# Allegro board pcb-01_place_manually.brd
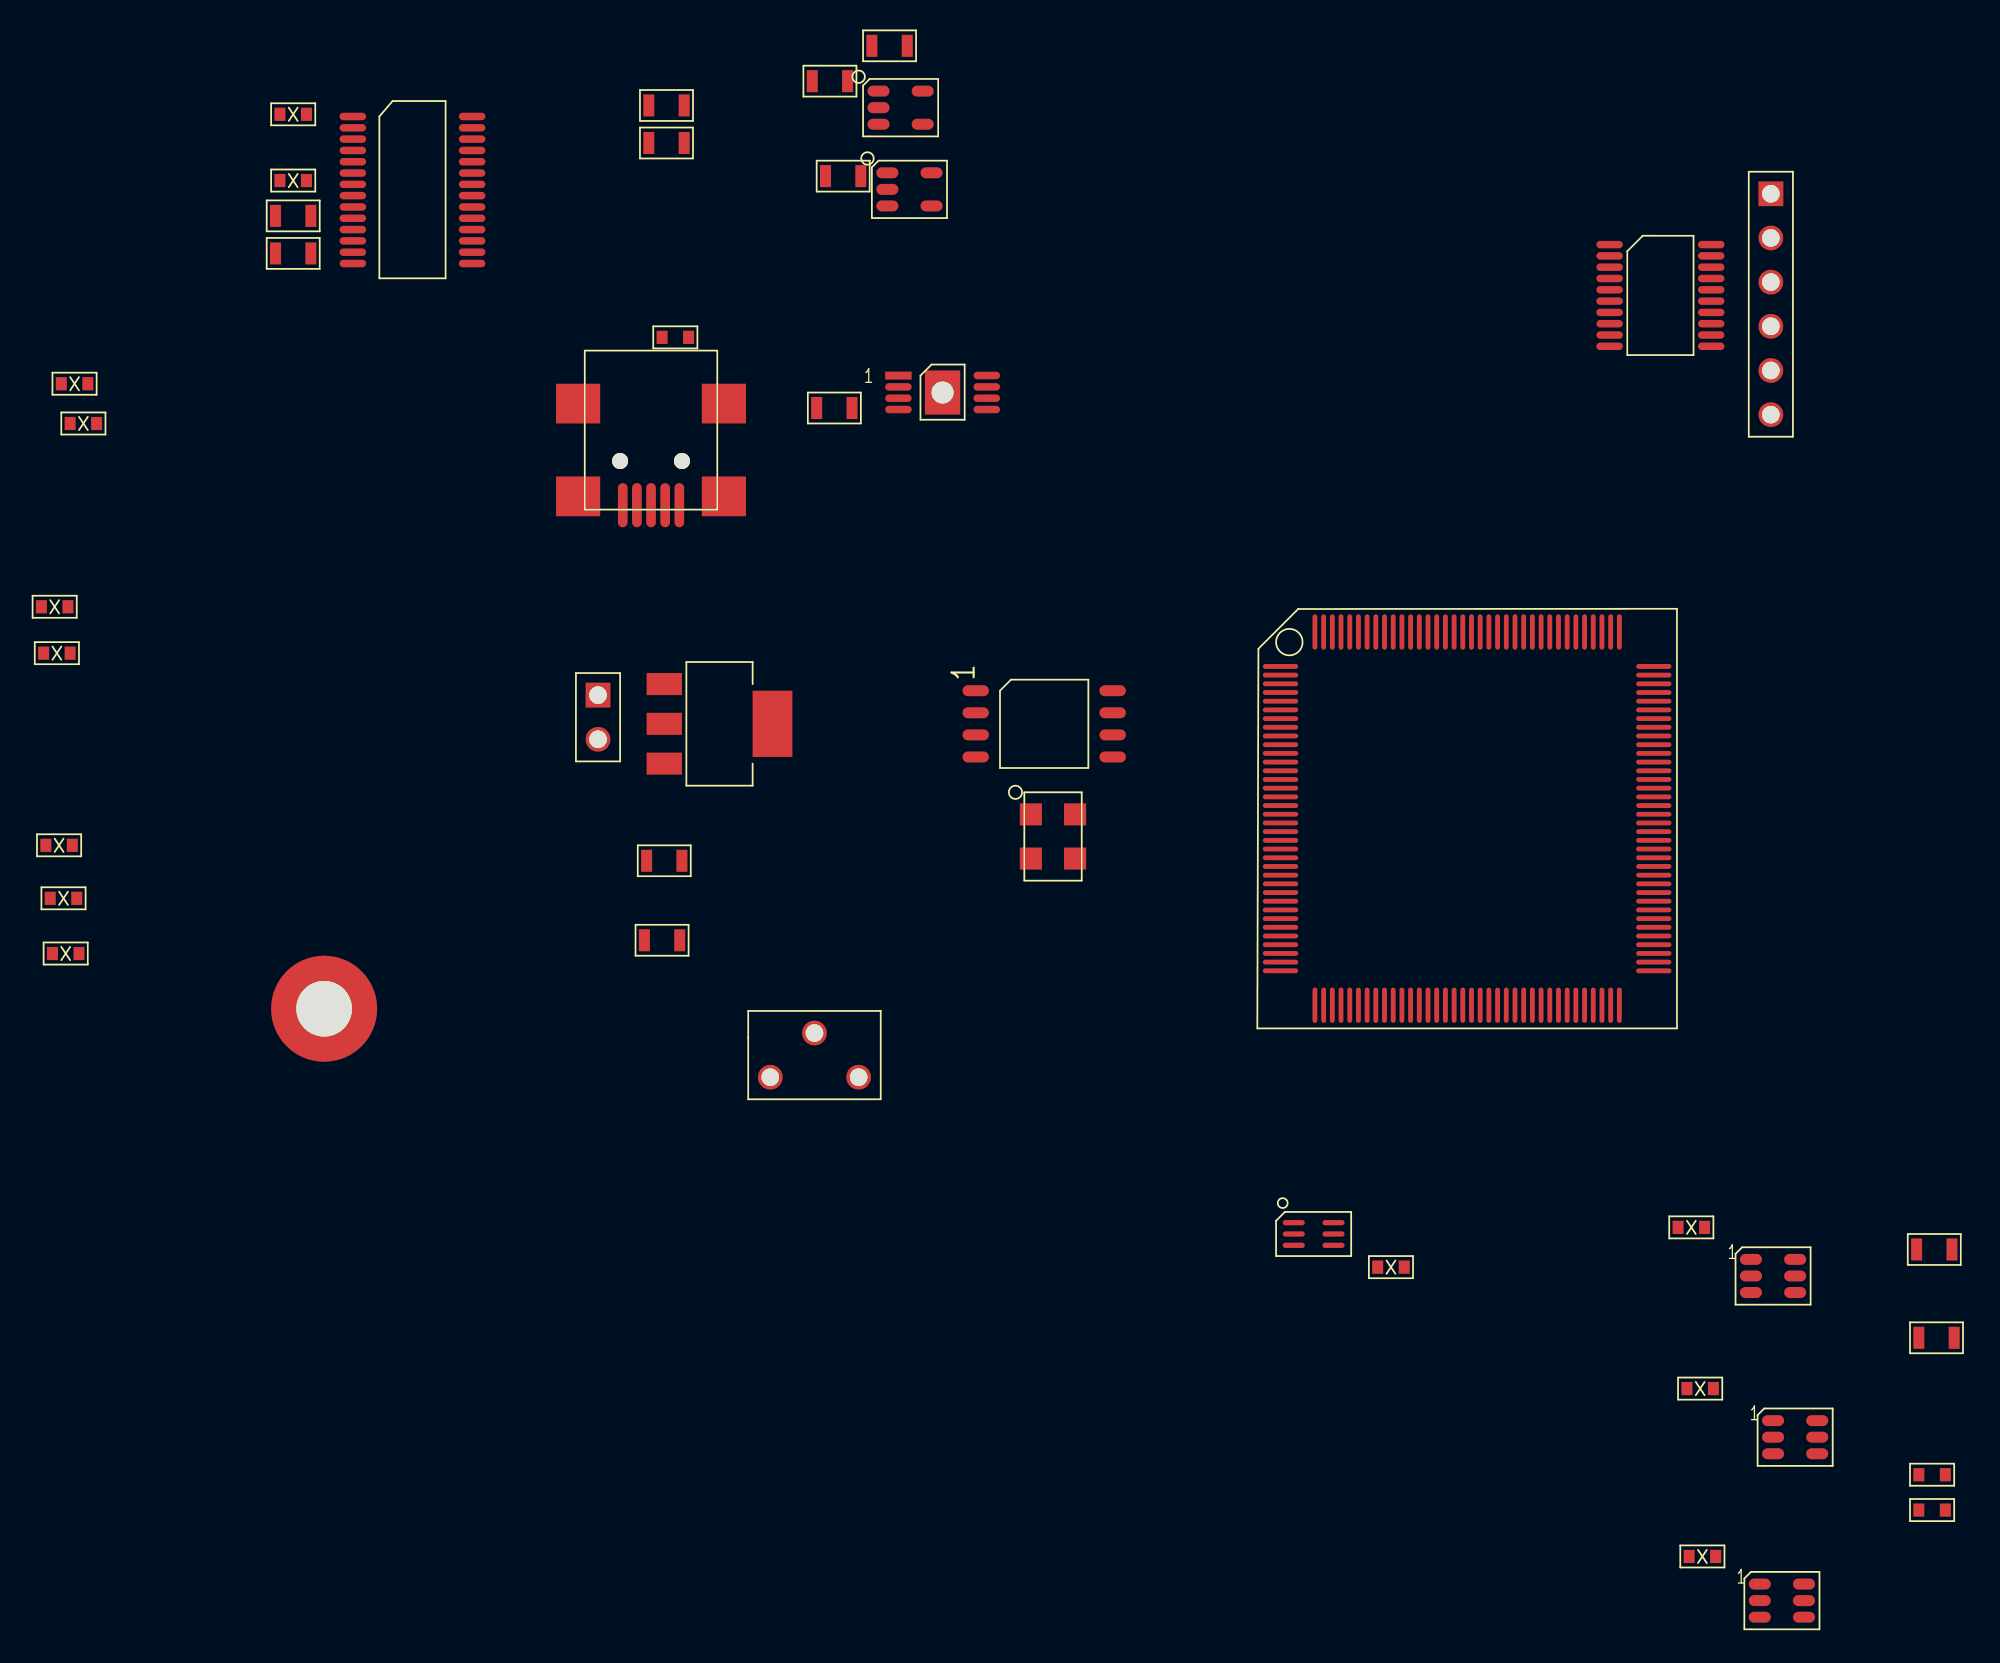
[diagram p0: board, top side]
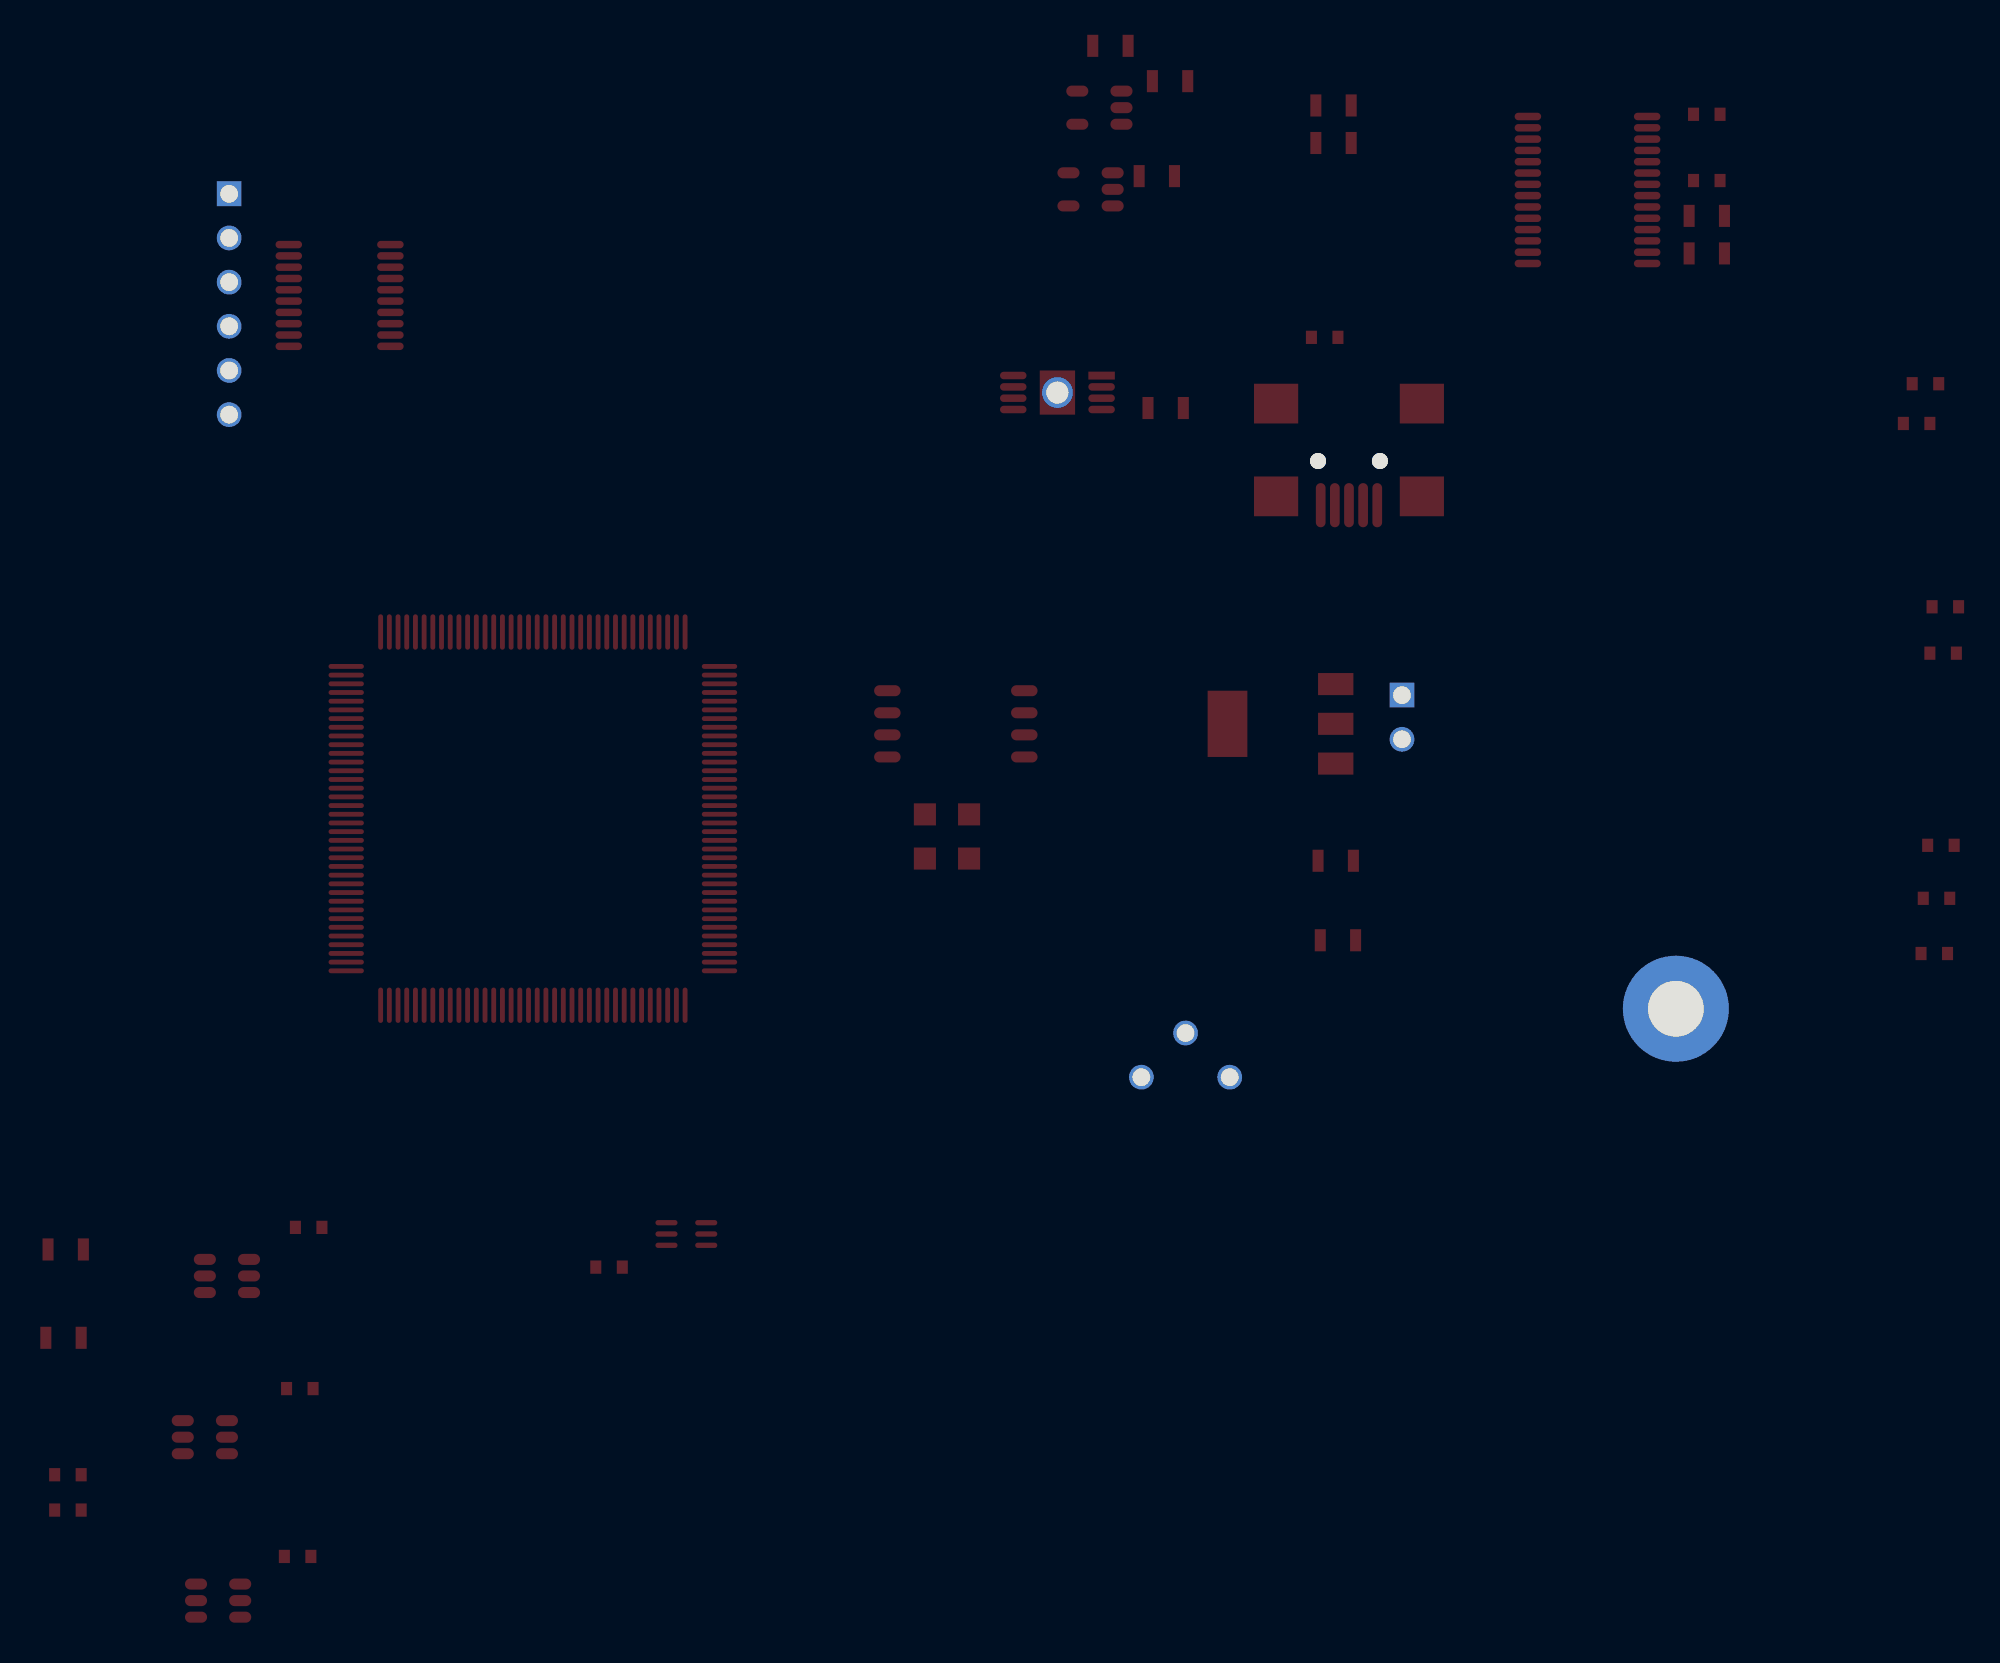
[diagram p1: board, bottom side, seen from below]

No outline. copper layers: TOP, IN1, IN2, BOTTOM. Coordinates in mm from the lowest, leftmost part position.

## Design rules (mm)
constraint set DEFAULT: min track width 0.203

## Placement (name value [footprint] x y rotation side)
C2  1uF  [S_0805]  44.58 87.38 0 top
C4  47uF/6.3V  [S_0805]  35.18 85.98 0 top
C5  47uF/6.3V  [S_0805]  48.01 89.41 0 top
C6  47uF/6.3V  [S_0805]  45.34 81.91 0 top
C7  100nF  [S_0603_X]  13.72 85.47 0 top
C11  47uF/6.3V  [S_0805]  35.18 83.82 0 top
C12  47uF/6.3V  [S_0805]  44.83 68.58 0 top
C14  100nF  [S_0603_X]  13.72 81.66 0 top
C16  100nF  [S_0603_X]  1.14 69.98 0 top
C18  100nF  [S_0603_X]  1.65 67.69 0 top
C24  100nF  [S_0603_X]  0 57.15 0 top
C26  100nF  [S_0603_X]  0.13 54.48 0 top
C32  100nF  [S_0603_X]  0.25 43.43 0 top
C34  100nF  [S_0603_X]  0.51 40.39 0 top
C36  100nF  [S_0603_X]  0.64 37.21 0 top
C46  100nF  [S_0603_X]  76.84 19.18 0 top
C47  100nF  [S_0603_X]  94.11 21.46 0 top
C49  100nF  [S_0603_X]  94.62 12.19 0 top
C51  100nF  [S_0603_X]  94.74 2.54 0 top
C53  47uF/6.3V  [S_0805]  108.08 20.19 0 top
C56  47uF/6.3V  [S_0805]  108.2 15.11 0 top
H*  -  [unnamed]  15.49 34.04 0 top
J5  CON2  [T_SIP2]  31.24 52.07 0 top
J8  con_1line_6  [T_SIP6]  98.68 80.9 0 top
L1  BLM18KG121TN1  [S_0603]  35.69 72.64 0 top
L2  BLM18KG121TN1  [S_0603]  107.95 7.24 0 top
L3  BLM18KG121TN1  [S_0603]  107.95 5.21 0 top
OSC1  ASFLMB-22.1184MHz  [S_ASFLMB]  57.4 43.94 0 top
Q1  BCP53  [S_SOT223]  35.05 50.42 0 top
R2  100  [S_0805]  13.72 79.63 0 top
R3  100  [S_0805]  13.72 77.47 0 top
R5  10  [S_0805]  35.05 42.55 0 top
R7  1k  [S_0805]  34.92 37.97 0 top
U1  TPS76925  [S_SOT_5_110]  48.64 85.85 0 top
U2  FTD232R  [S_SOG_28_RM256]  17.15 85.34 0 top
U3  TPS76912  [S_SOT_5_110]  49.15 81.15 0 top
U4  TPS79433_MSOP  [S_MSOP8_RM256_PPAD_HAND_MADE]  51.05 69.47 0 top
U5  TCS3103  [P_TCS310X]  72.39 21.08 0 top
U6  XC3S400-TQ144  [S_QFP_144_RM_197]  70.48 53.72 0 top
U7  AD7478ARTZ-500RL7  [S_SOT_6_110]  98.81 18.67 0 top
U8  25lc1024  [S_SOIC8_310]  52.96 52.32 0 top
U9  AD7478ARTZ-500RL7  [S_SOT_6_110]  100.08 9.4 0 top
U10  AD7478ARTZ-500RL7  [S_SOT_6_110]  99.31 0 0 top
U11  XCF02S  [S_SOG_20_230_RM256]  89.41 77.98 0 top
USB1  USB  [S_USB_MINI_B]  34.29 65.53 180 top
VR4  1k_SMD  [T_PT10H]  43.69 30.1 0 top

## Library data of the parts
C2 C4-C7 C11 C12 C14 C16 C18 C24 C26 C32 C34 C36 C47 C49 C51 C53 C56 = CAP NP
C46 = C
J5 = CON2
J8 = con_1line_6
L1-L3 = L
OSC1 = OSC
Q1 = PNP_SOT23_1
R2 R3 R5 R7 = R
U1 U3 = TPS769xx
U2 = FTD232R_0
U4 = TPS79401_ADJ_3
U5 = TCS3103
U6 = XC3S200_1
U7 U9 U10 = ADC081S021
U8 = AT25XXXA
U11 = XCF01S_3
USB1 = header_0
VR4 = RESISTOR VAR

## Footprints (pads in the part's own frame, mm; a bottom-side part is the same pattern mirrored in y, then rotated)
P_TCS310X
  oval 1.27x0.305 smd: 1(-1.143,0.65) 2(-1.143,0) 3(-1.143,-0.65) 4(1.143,-0.65) 5(1.143,0) 6(1.143,0.65)
S_0603
  rect 0.635x0.762 smd: 1(-0.762,0) 2(0.762,0)
S_0603_X
  rect 0.635x0.762 smd: 1(-0.762,0) 2(0.762,0)
S_0805
  rect 0.635x1.27 smd: 1(-1.016,0) 2(1.016,0)
S_ASFLMB
  rect 1.27x1.27 smd: 1(-1.27,1.27) 2(-1.27,-1.27) 3(1.27,-1.27) 4(1.27,1.27)
S_MSOP8_RM256_PPAD_HAND_MADE
  rect 1.524x0.457 smd: 1(-2.54,0.975)
  oval 1.524x0.432 smd: 2(-2.54,0.325) 3(-2.54,-0.325) 4(-2.54,-0.975) 5(2.54,-0.975) 6(2.54,-0.325) 7(2.54,0.325) 8(2.54,0.98)
  rect 2.032x2.54 hole 1.27: 9(0,0)
S_QFP_144_RM_197
  oval 2.032x0.279 smd: 1(0,0) 2(0,-0.5) 3(0,-1) 4(0,-1.5) 5(0,-2.001) 6(0,-2.501) 7(0,-3.001) 8(0,-3.501) 9(0,-4.001) 10(0,-4.501) 11(0,-5.001) 12(0,-5.501) 13(0,-6.002) 14(0,-6.502) 15(0,-7.002) 16(0,-7.502) 17(0,-8.002) 18(0,-8.502) 19(0,-9.002) 20(0,-9.502) 21(0,-10.002) 22(0,-10.503) 23(0,-11.003) 24(0,-11.503) 25(0,-12.003) 26(0,-12.503) 27(0,-13.003) 28(0,-13.503) 29(0,-14.004) 30(0,-14.504) 31(0,-15.004) 32(0,-15.504) 33(0,-16.004) 34(0,-16.504) 35(0,-17.004) 36(0,-17.504) 73(21.463,-17.504) 74(21.463,-17.004) 75(21.463,-16.504) 76(21.463,-16.004) 77(21.463,-15.504) 78(21.463,-15.004) 79(21.463,-14.504) 80(21.463,-14.004) 81(21.463,-13.503) 82(21.463,-13.003) 83(21.463,-12.503) 84(21.463,-12.003) 85(21.463,-11.503) 86(21.463,-11.003) 87(21.463,-10.503) 88(21.463,-10.002) 89(21.463,-9.502) 90(21.463,-9.002) 91(21.463,-8.502) 92(21.463,-8.002) 93(21.463,-7.502) 94(21.463,-7.002) 95(21.463,-6.502) 96(21.463,-6.002) 97(21.463,-5.501) 98(21.463,-5.001) 99(21.463,-4.501) 100(21.463,-4.001) 101(21.463,-3.501) 102(21.463,-3.001) 103(21.463,-2.501) 104(21.463,-2.001) 105(21.463,-1.5) 106(21.463,-1) 107(21.463,-0.5) 108(21.463,0)
  oval 0.279x2.032 smd: 37(1.979,-19.484) 38(2.479,-19.484) 39(2.979,-19.484) 40(3.479,-19.484) 41(3.98,-19.484) 42(4.48,-19.484) 43(4.98,-19.484) 44(5.48,-19.484) 45(5.98,-19.484) 46(6.48,-19.484) 47(6.98,-19.484) 48(7.481,-19.484) 49(7.981,-19.484) 50(8.481,-19.484) 51(8.981,-19.484) 52(9.481,-19.484) 53(9.981,-19.484) 54(10.481,-19.484) 55(10.981,-19.484) 56(11.482,-19.484) 57(11.982,-19.484) 58(12.482,-19.484) 59(12.982,-19.484) 60(13.482,-19.484) 61(13.982,-19.484) 62(14.483,-19.484) 63(14.983,-19.484) 64(15.483,-19.484) 65(15.983,-19.484) 66(16.483,-19.484) 67(16.983,-19.484) 68(17.483,-19.484) 69(17.983,-19.484) 70(18.484,-19.484) 71(18.984,-19.484) 72(19.484,-19.484) 109(19.484,1.979) 110(18.983,1.979) 111(18.484,1.979) 112(17.983,1.979) 113(17.483,1.979) 114(16.983,1.979) 115(16.483,1.979) 116(15.983,1.979) 117(15.483,1.979) 118(14.982,1.979) 119(14.482,1.979) 120(13.982,1.979) 121(13.482,1.979) 122(12.982,1.979) 123(12.482,1.979) 124(11.982,1.979) 125(11.482,1.979) 126(10.981,1.979) 127(10.481,1.979) 128(9.981,1.979) 129(9.481,1.979) 130(8.981,1.979) 131(8.481,1.979) 132(7.981,1.979) 133(7.481,1.979) 134(6.98,1.979) 135(6.48,1.979) 136(5.98,1.979) 137(5.48,1.979) 138(4.98,1.979) 139(4.48,1.979) 140(3.98,1.979) 141(3.479,1.979) 142(2.979,1.979) 143(2.479,1.979) 144(1.979,1.979)
S_SOG_20_230_RM256
  oval 1.524x0.432 smd: 1(0,0) 2(0,-0.65) 3(0,-1.3) 4(0,-1.95) 5(0,-2.6) 6(0,-3.25) 7(0,-3.9) 8(0,-4.55) 9(0,-5.2) 10(0,-5.85) 11(5.842,-5.85) 12(5.842,-5.2) 13(5.842,-4.55) 14(5.842,-3.9) 15(5.842,-3.25) 16(5.842,-2.6) 17(5.842,-1.95) 18(5.842,-1.3) 19(5.842,-0.65) 20(5.842,0)
S_SOG_28_RM256
  oval 1.524x0.432 smd: 1(0,0) 2(0,-0.65) 3(0,-1.3) 4(0,-1.951) 5(0,-2.601) 6(0,-3.251) 7(0,-3.901) 8(0,-4.552) 9(0,-5.202) 10(0,-5.852) 11(0,-6.502) 12(0,-7.153) 13(0,-7.803) 14(0,-8.453) 15(6.858,-8.453) 16(6.858,-7.803) 17(6.858,-7.153) 18(6.858,-6.502) 19(6.858,-5.852) 20(6.858,-5.202) 21(6.858,-4.552) 22(6.858,-3.901) 23(6.858,-3.251) 24(6.858,-2.601) 25(6.858,-1.951) 26(6.858,-1.3) 27(6.858,-0.65) 28(6.858,0)
S_SOIC8_310
  oval 1.524x0.635 smd: 1(0,0) 2(0,-1.27) 3(0,-2.54) 4(0,-3.81) 5(7.874,-3.81) 6(7.874,-2.54) 7(7.874,-1.27) 8(7.874,0)
S_SOT223
  rect 2.032x1.27 smd: 1(0,2.286) 2(0,0) 3(0,-2.286)
  rect 2.286x3.81 smd: 4(6.223,0)
S_SOT_5_110
  oval 1.27x0.635 smd: 1(-1.27,0.953) 2(-1.27,0) 3(-1.27,-0.953) 4(1.27,-0.953) 5(1.27,0.953)
S_SOT_6_110
  oval 1.27x0.635 smd: 1(-1.27,0.953) 2(-1.27,0) 3(-1.27,-0.953) 4(1.27,-0.953) 5(1.27,0) 6(1.27,0.953)
S_USB_MINI_B
  round 0.914 hole 0.914: (-1.778,0) (1.778,0)
  oval 0.559x2.54 smd: 1(-1.626,2.54) 2(-0.813,2.54) 3(0,2.54) 4(0.813,2.54) 5(1.626,2.54)
  rect 2.54x2.286 smd: X1(-4.191,2.032) X2(4.191,2.032) X3(-4.191,-3.302) X4(4.191,-3.302)
T_PT10H
  round 1.422 hole 1.016: 1(-2.54,0) 2(0,2.54) 3(2.54,0)
T_SIP2
  rect 1.422x1.422 hole 1.016: 1(0,0)
  round 1.422 hole 1.016: 2(0,-2.54)
T_SIP6
  rect 1.422x1.422 hole 1.016: 1(0,0)
  round 1.422 hole 1.016: 2(0,-2.54) 3(0,-5.08) 4(0,-7.62) 5(0,-10.16) 6(0,-12.7)
unnamed
  round 6.096 hole 3.2: 1(0,0)

## Nets
1V2: C6.1 C16.1 C18.1 U3.5(OUT) U6.49 U6.61 U6.121 U6.133
2V5: C5.1 C24.1 C26.1 J8.6 U1.5(OUT) U6.48 U6.62 U6.120 U6.134 U11.19(VCCO) U11.20
3V3: C12.1 C32.1 C34.1 C36.1 C53.1 L2.2 OSC1.1 OSC1.4(VCC) U4.1(VOUT) U6.3 U6.19 U6.34 U6.43 U6.54 U6.66 U6.75 U6.91 U6.106 U6.115 U6.126 U6.138(VCCO_TOP#138) U8.8 U11.18
3V3_A: C47.1 C49.1 C51.1 C56.1 L2.1 U7.1 U9.1 U10.1
5V: C2.1 C11.1 C46.2 L1.1 R5.2 U1.1 U3.1 U4.6 U4.8 U5.1 VR4.3
GND: C2.2 C4.2 C5.2 C6.2 C7.2 C11.2 C12.2 C14.2 C16.2 C18.2 C24.2 C26.2 C32.2 C34.2 C36.2 C53.2 J5.2 J8.5 L3.2 OSC1.2 U1.2 U1.3 U2.7 U2.18 U2.21 U2.25 U2.26 U3.2 U3.3 U4.5 U4.9 U6.9 U6.16 U6.22 U6.29 U6.42 U6.45 U6.64 U6.67 U6.81 U6.88 U6.94 U6.101 U6.114 U6.117 U6.136 U6.139 U6.142 U8.3(W\P\) U8.4 U11.11 USB1.5 VR4.1
GNDA: C46.1 C47.2 C49.2 C51.2 C56.2 L3.1 U5.2 U7.2 U9.2 U10.2
B_CS: U6.15 U10.6
B_SCLK: U6.18 U10.4
B_SDATA: U6.17 U10.5
CLK: OSC1.3 U6.128
EE_CS: U6.27 U8.1
EE_HOLD: U6.30 U8.7
EE_SCK: U6.31 U8.6
EE_SI: U6.32 U8.5
EE_SO: U6.28 U8.2
G_CS: U6.11 U9.6
G_SCLK: U6.13 U9.4
G_SDATA: U6.12 U9.5
JTAG_TCK: J8.4 U6.110 U11.6
JTAG_TDI: J8.2 U11.4
JTAG_TDO: J8.3 U6.109
JTAG_TMS: J8.1 U6.111 U11.5
MFP: U5.3 U6.2
R_CS: U6.6 U7.6
R_SCLK: U6.8 U7.4
R_SDATA: U6.7 U7.5
USB_5V: C4.1 C7.1 L1.2 U2.19 U2.20 USB1.1
USB_RXD: R3.2 U6.56
USB_TXD: R2.2 U6.55
VOB: U5.4 U10.3(VIN)
VOG: U5.5 U9.3(VIN)
VOR: U5.6(VOR) U7.3(VIN)
X1: USB1.X1
X2: USB1.X2
X3: USB1.X3
X4: USB1.X4
N14222977: U6.58 U11.8
N14223549: U6.143 U11.7
N14223915: U6.144 U11.17
N14224669: U6.72 U11.3
N14224673: U6.71 U11.10
N14224773: U6.65 U11.1
N16483571: R2.1 U2.1
N16483583: C14.1 U2.4(VCCIO) U2.17
N16483649: R3.1 U2.5
N16483653: U2.16 USB1.2
N16483901: U2.15 USB1.3
N16494125: Q1.3(E) R5.1
N16494241: Q1.1 R7.1
N16494548: J5.1 Q1.2 Q1.4
N16494949: R7.2 VR4.2(WIPER)

Pads without a net: H* 1; U1 4; U2 2 3 6 8 9 10 11 12 13 14 22 23 24 27 28; U3 4; U4 2 3 4 7; U6 1 4 5 10 14 20 21 23 24 25 26 33 35 36 37 38 39 40 41 44 46 47 50 51 52 53 57 59 60 63 68 69 70 73 74 76 77 78 79 80 82 83 84 85 86 87 89 90 92 93 95 96 97 98 99 100 102 103 104 105 107 108 112 113 116 118 119 122 123 124 125 127 129 130 131 132 135 137 140 141; U11 2 9 12 13 14 15 16; USB1 4
